# Altium PCB L_radar_some_PCBs.PcbDoc (part 1 of 3)
Units mm, origin at the board's own origin, x right, y up, seen from the top; angles counter-clockwise.
Board outline 152.4 x 101.6 mm, 8 copper layers (Top Layer, Layer 5, Layer 3, Layer 1, Layer 2, Layer 4, Layer 6, Bottom Layer), stack 1.028 mm thick; 12 components, 0 nets, 0 pads, 2735 vias.
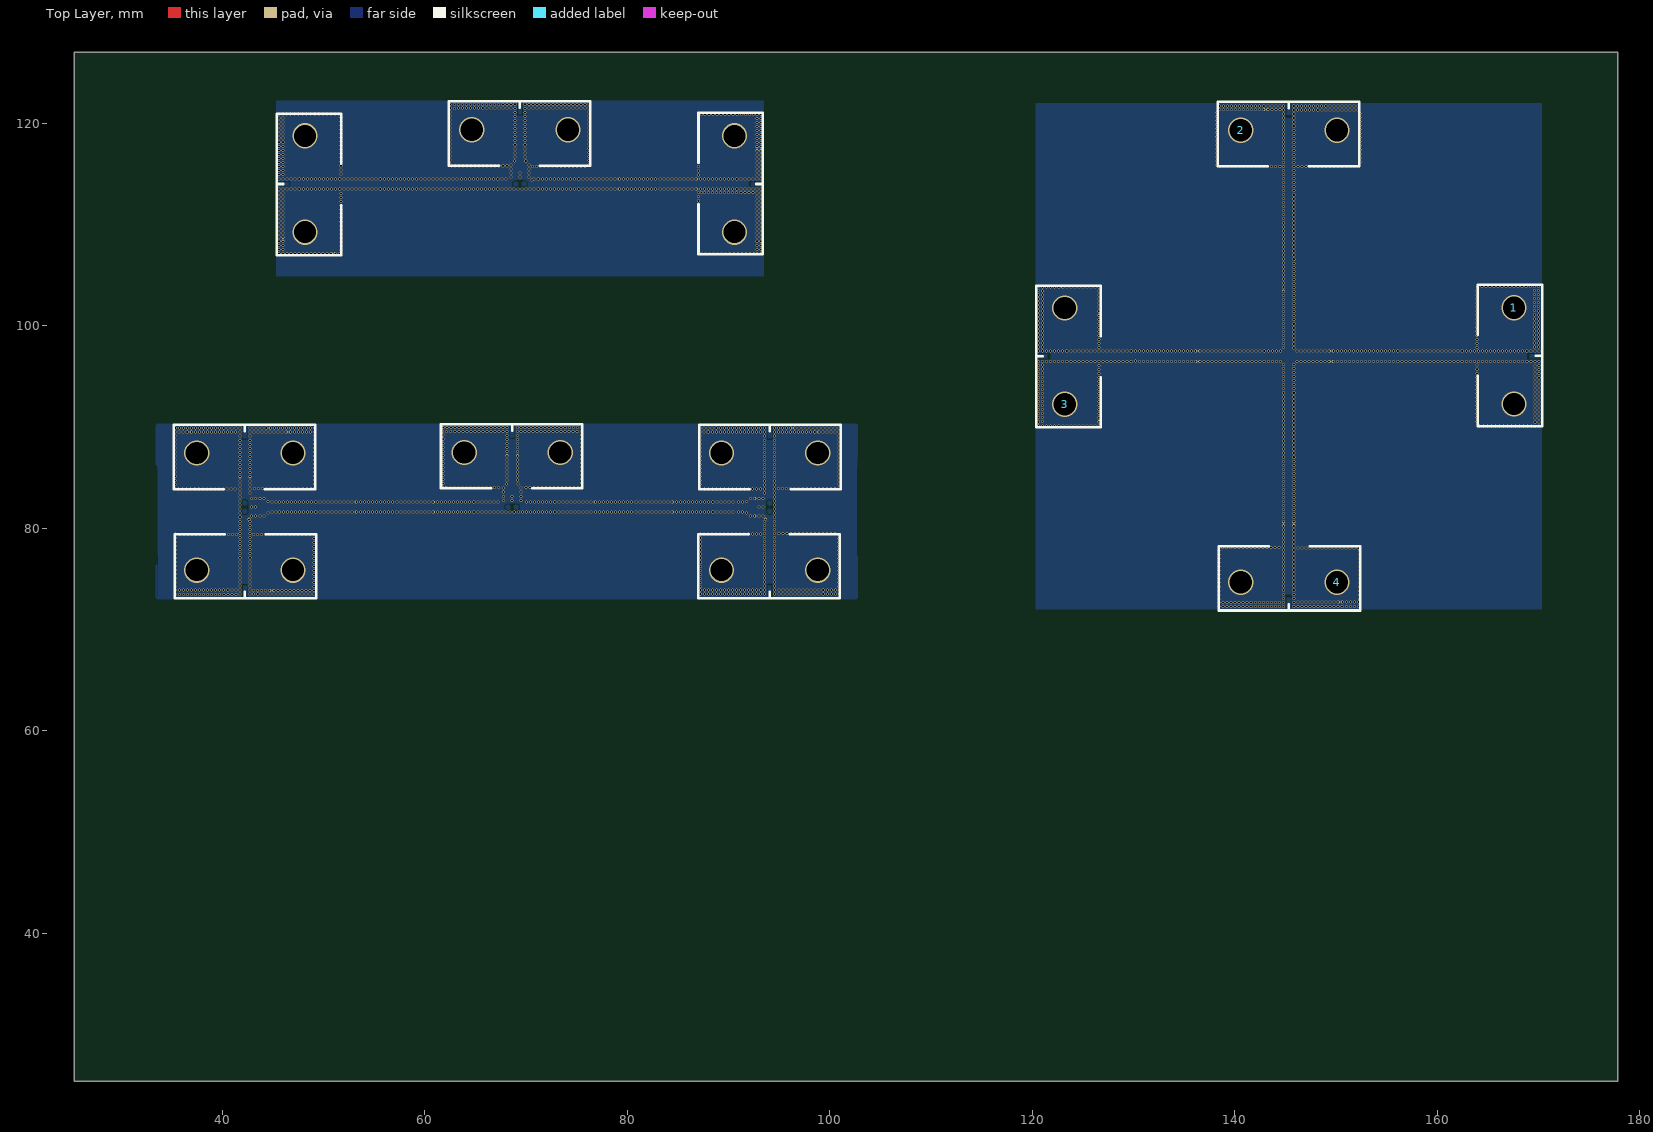
[diagram p0: Top Layer view]
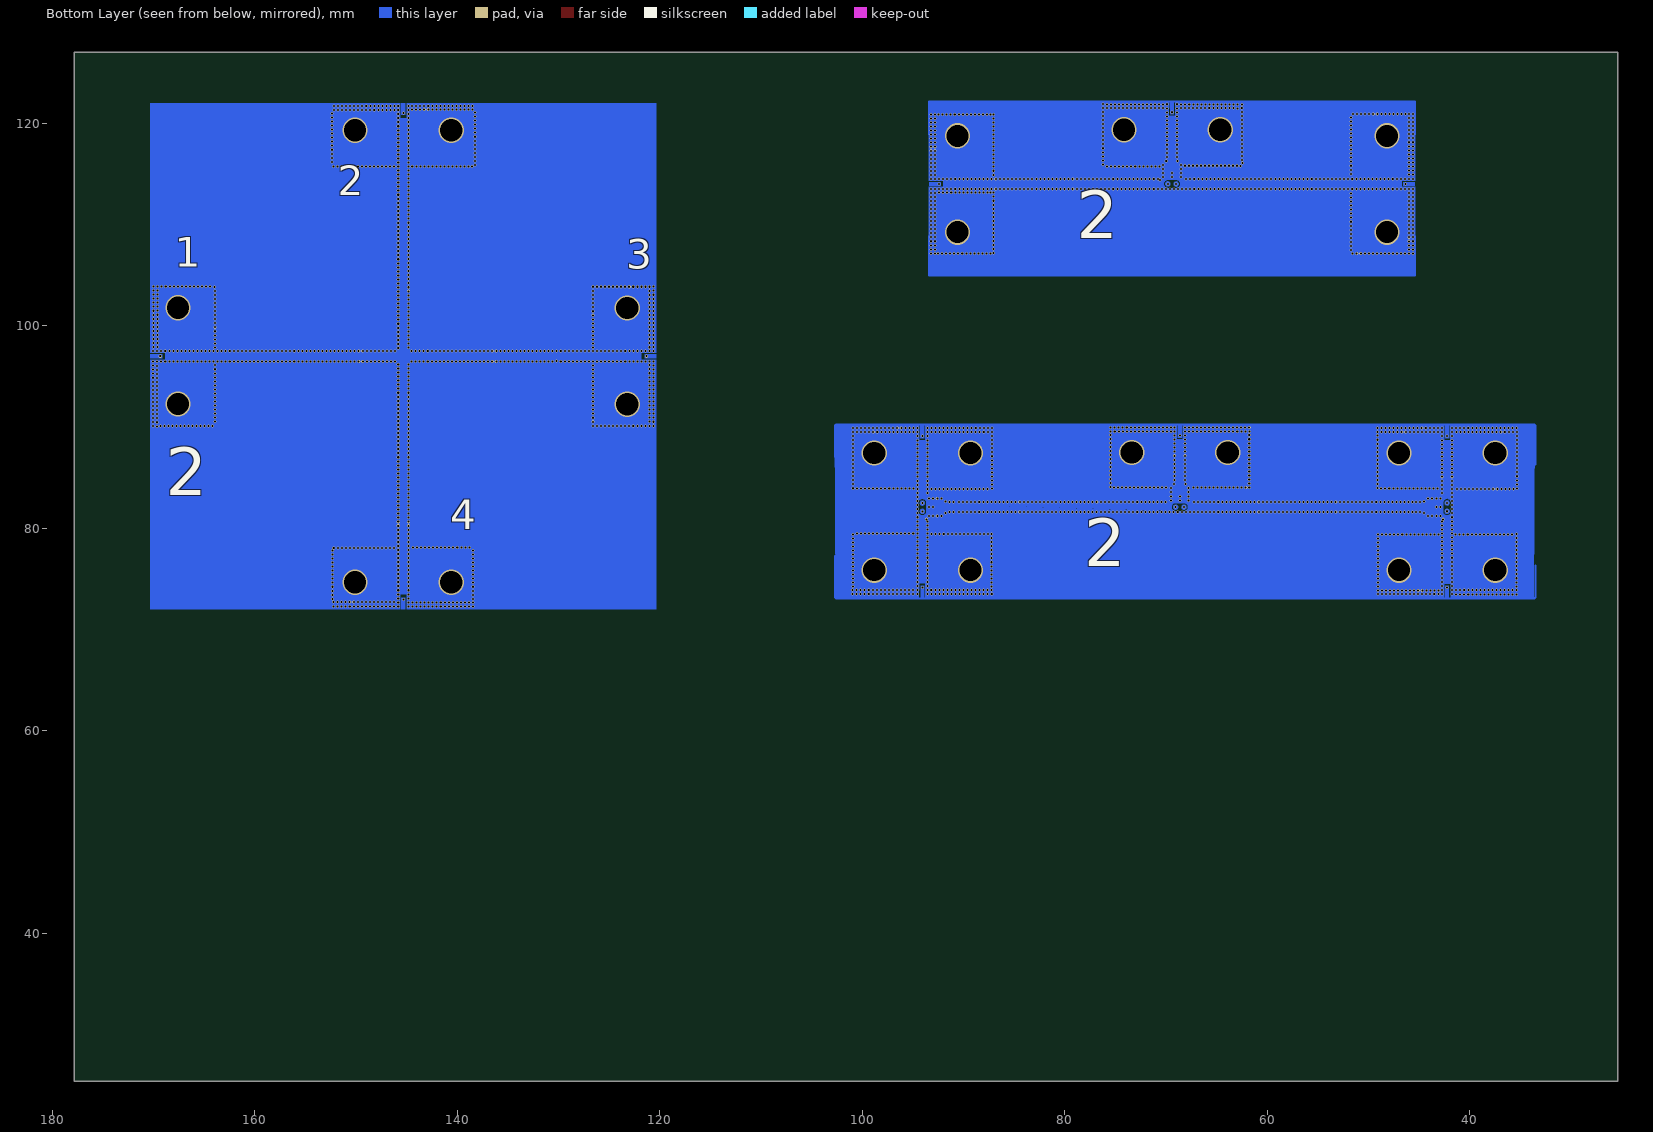
[diagram p1: Bottom Layer view, seen from below]
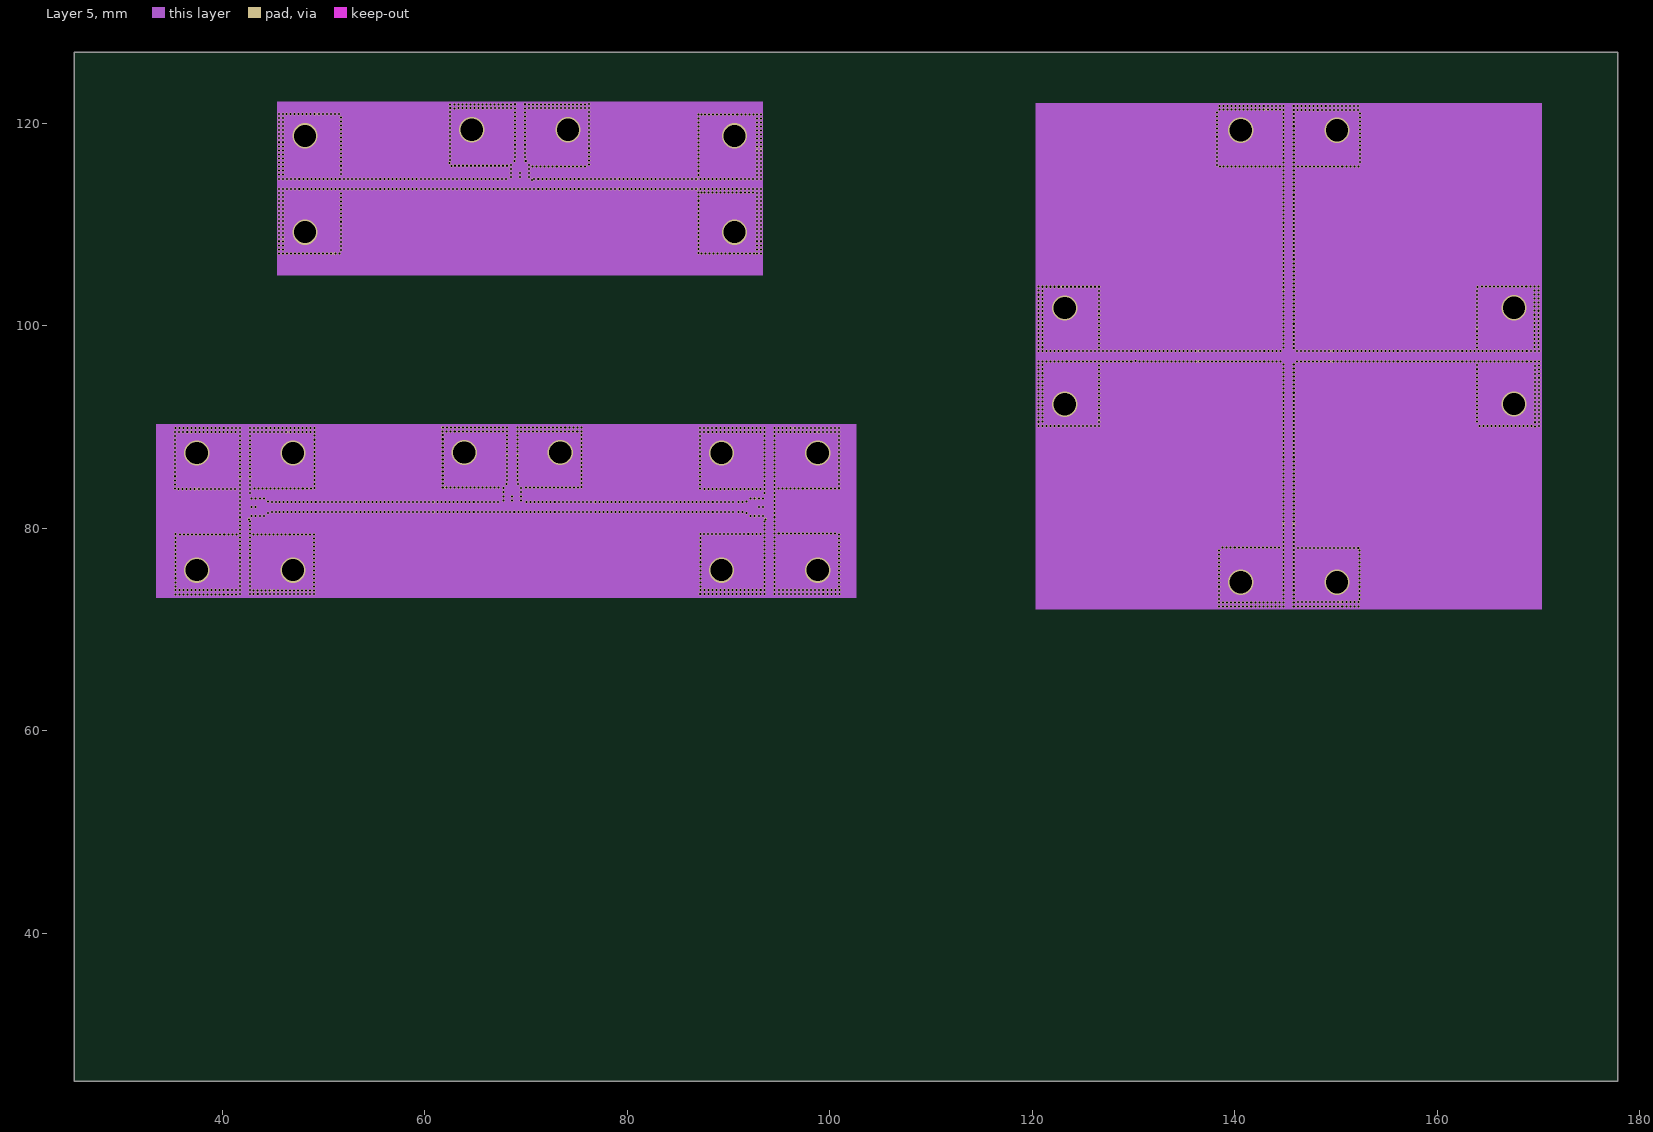
[diagram p2: Layer 5]
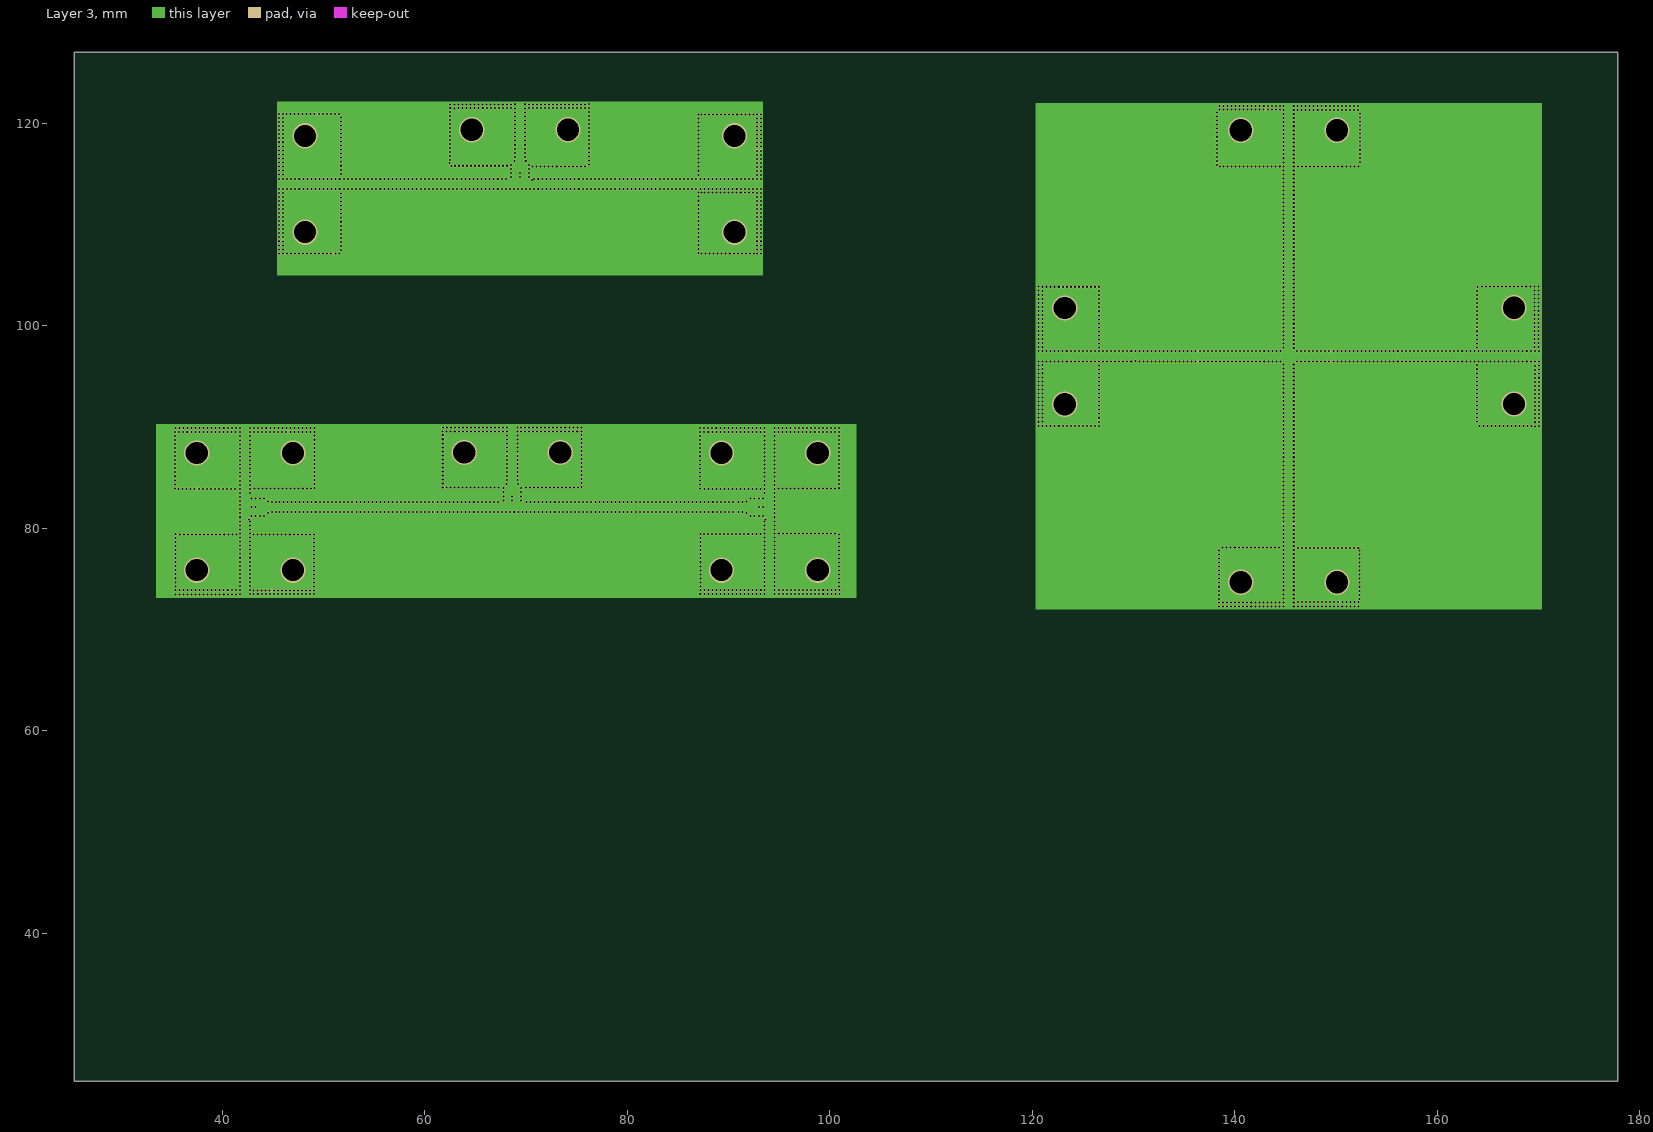
[diagram p3: Layer 3]
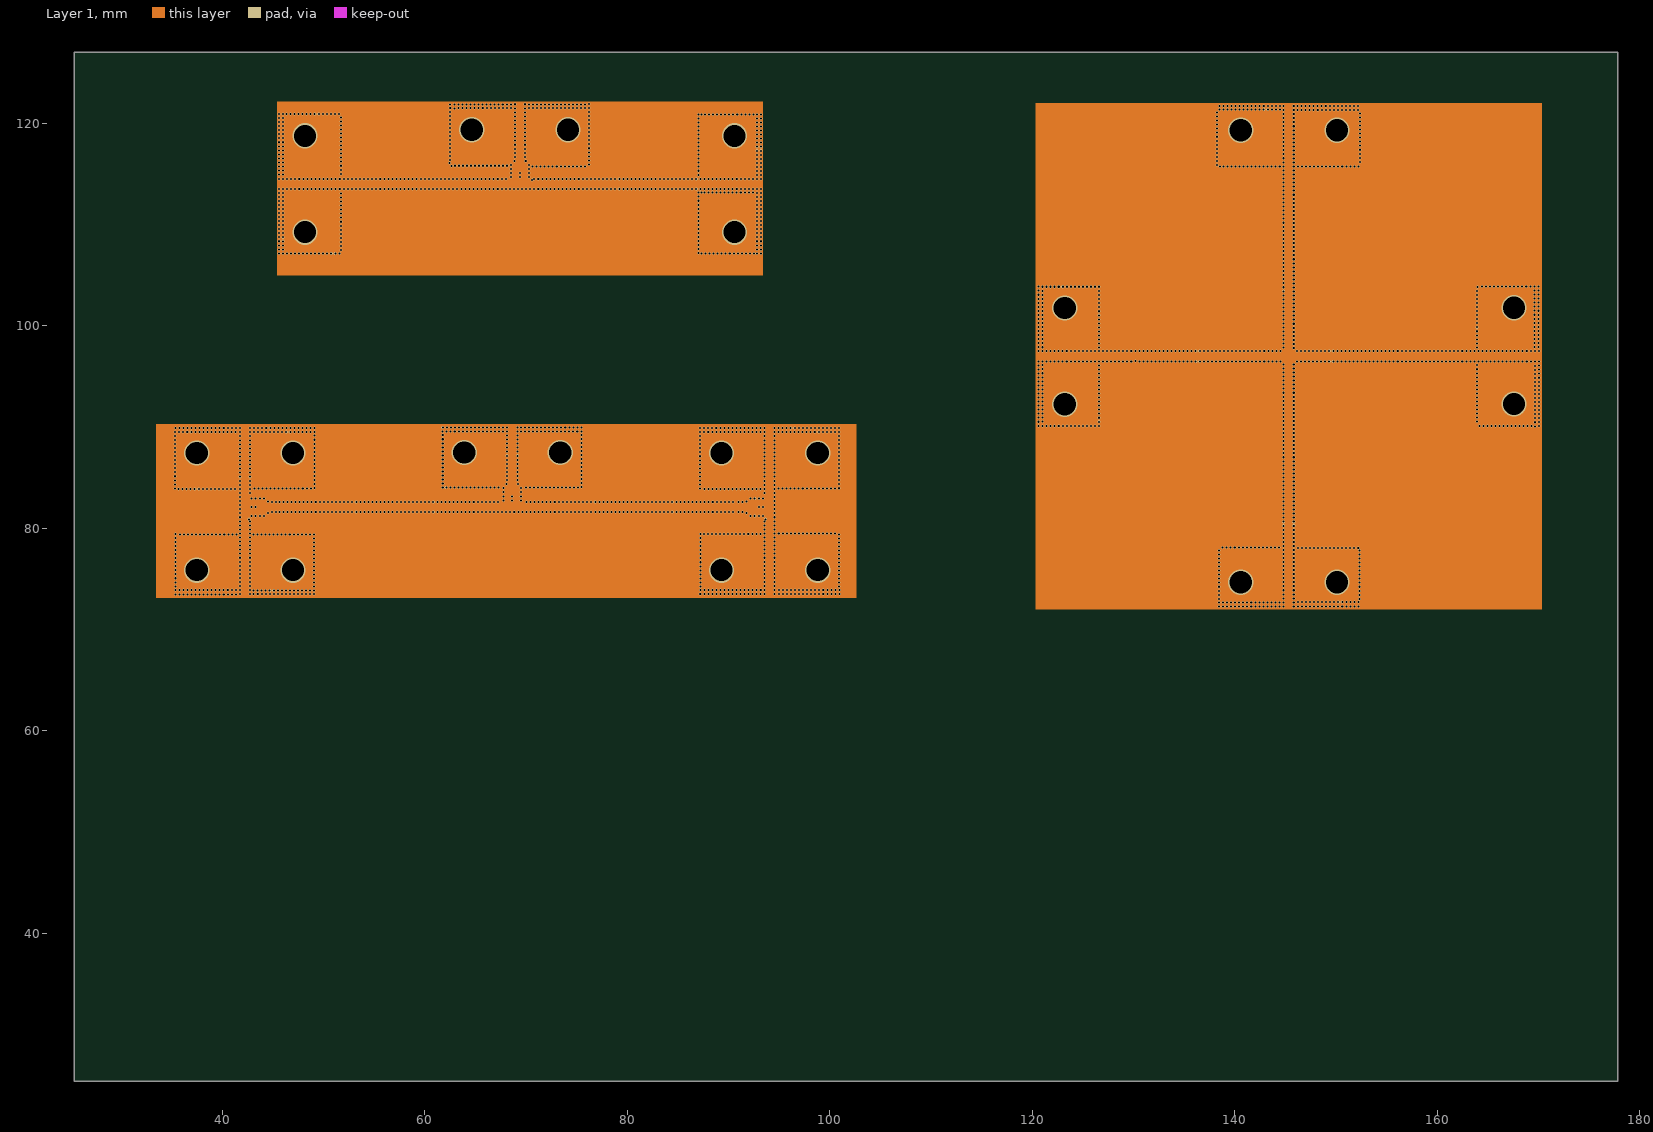
[diagram p4: Layer 1]
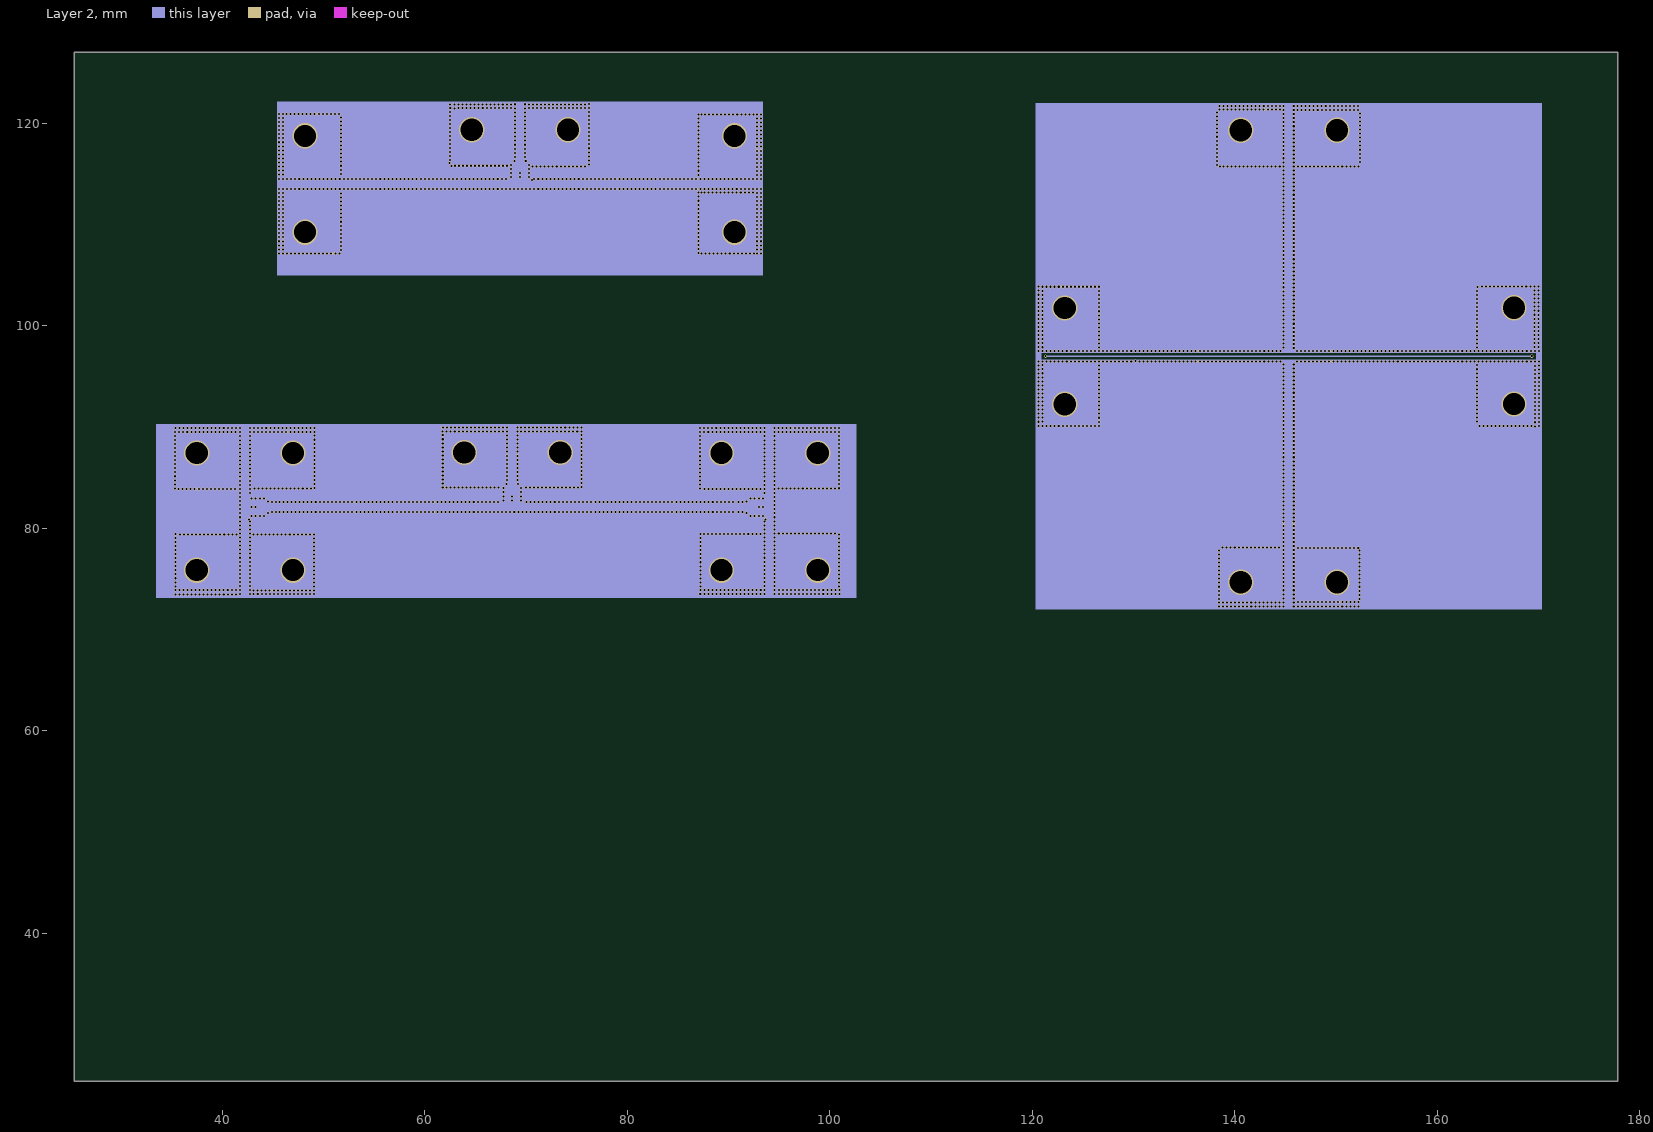
[diagram p5: Layer 2]
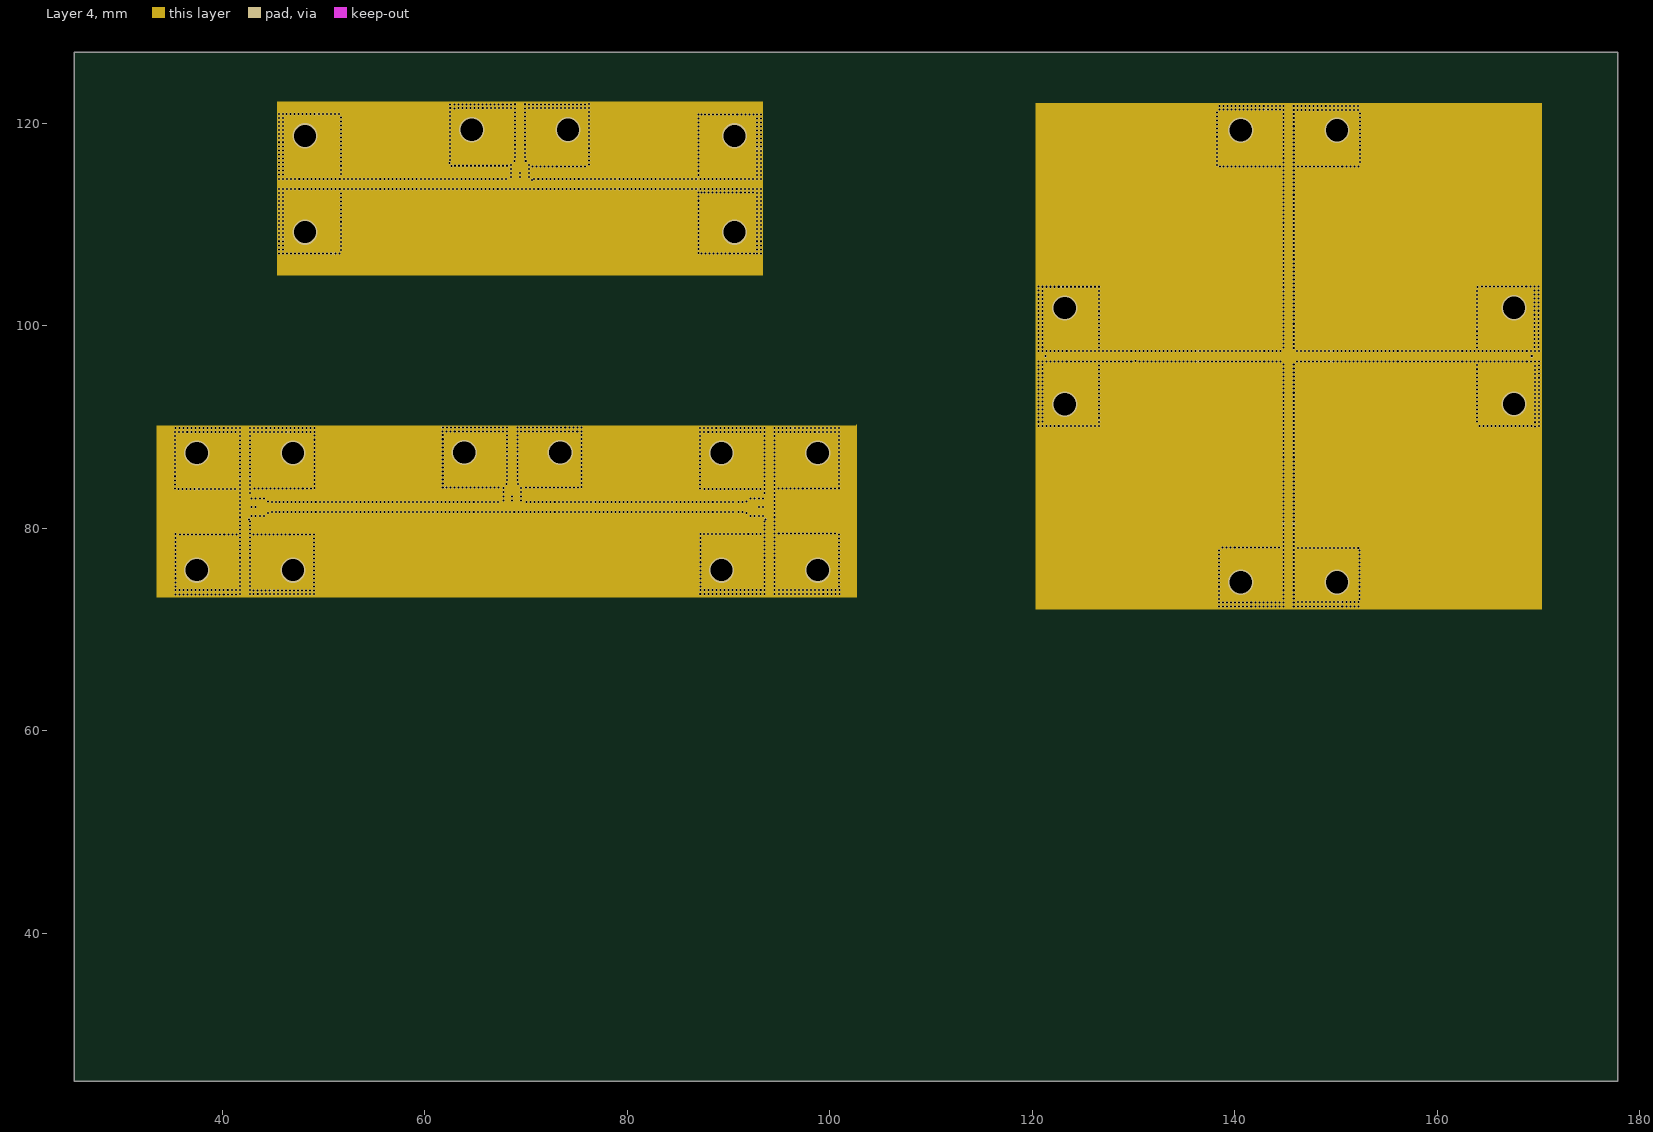
[diagram p6: Layer 4]
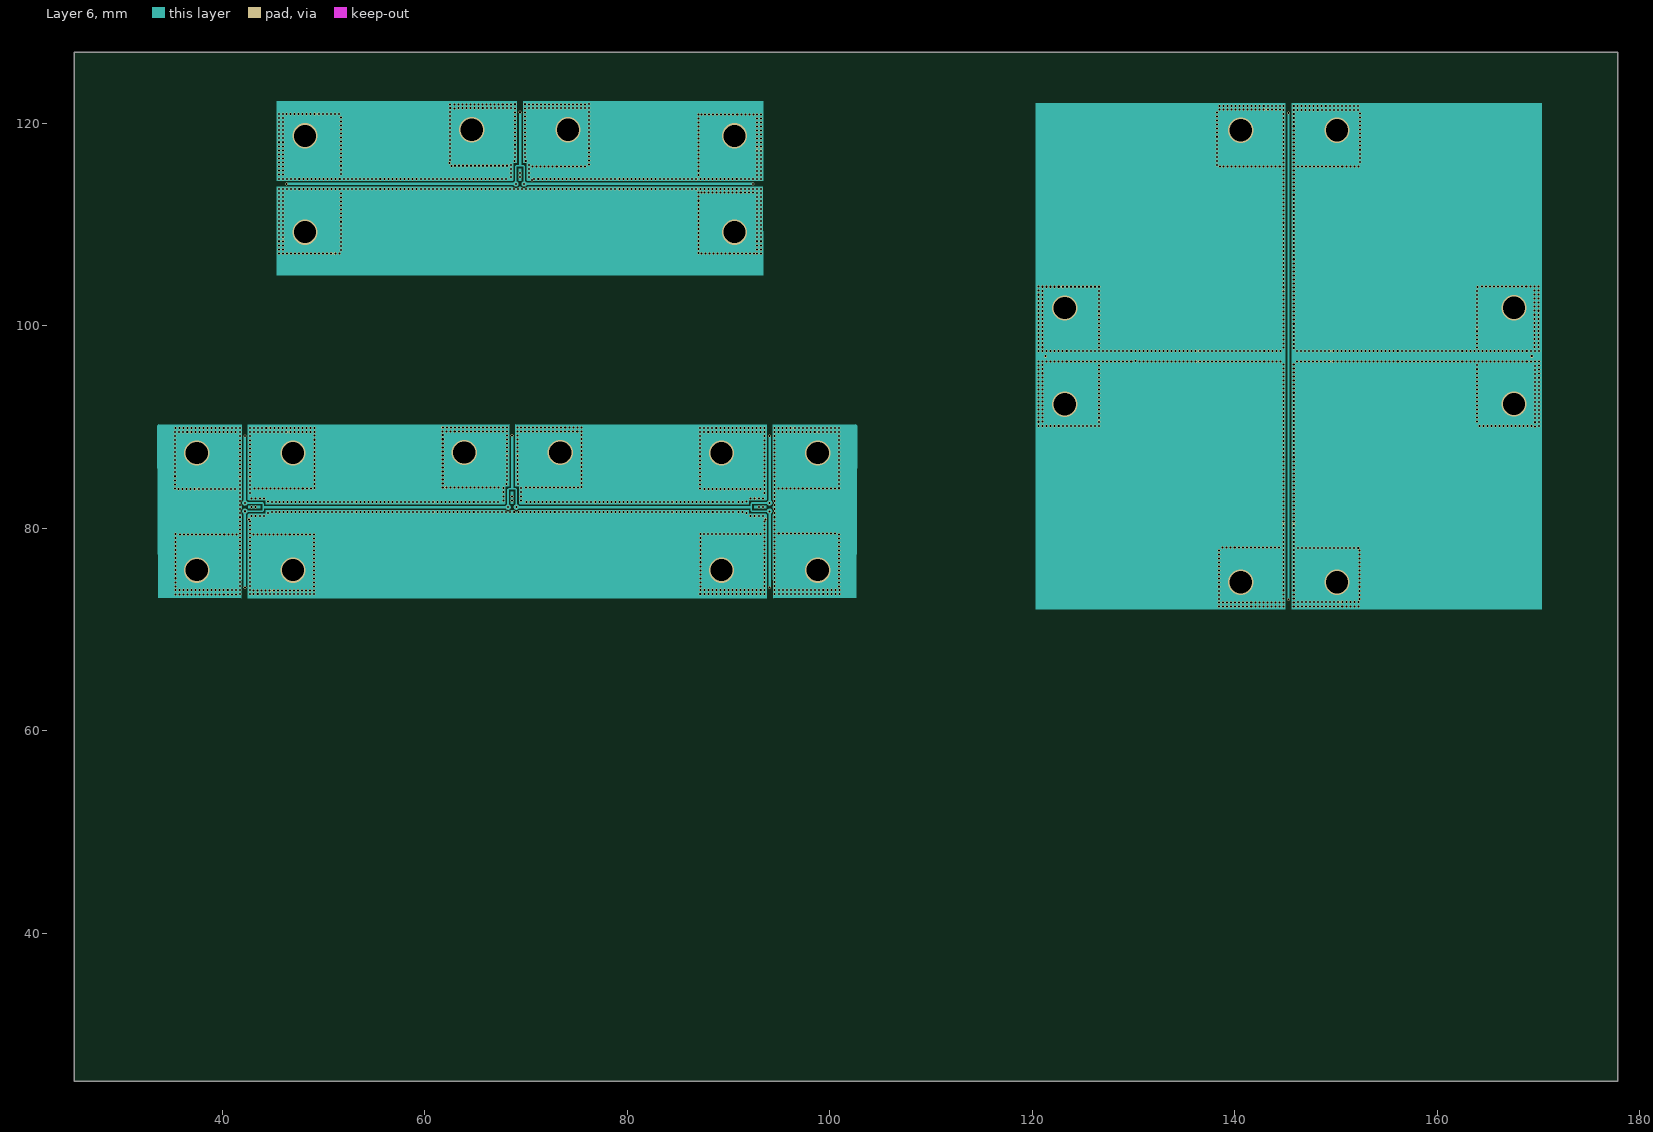
[diagram p7: Layer 6]

## Layer stack, top to bottom
Top Solder: solder mask 0.0102, Solder Resist, Dk 3.5
Top Layer: signal copper 0.0356
Dielectric 6: prepreg 0.0711, PP-006, Dk 4.1
Layer 5: signal copper 0.035
Dielectric 4: prepreg 0.0711, PP-006, Dk 4.1
Layer 3: signal copper 0.035
Dielectric 2: prepreg 0.0711, PP-006, Dk 4.1
Layer 1: signal copper 0.035
Dielectric 1: dielectric 0.32, FR-4, Dk 4.8
Layer 2: signal copper 0.035
Dielectric 3: prepreg 0.0711, PP-006, Dk 4.1
Layer 4: signal copper 0.035
Dielectric 5: prepreg 0.0711, PP-006, Dk 4.1
Layer 6: signal copper 0.035
Dielectric 7: prepreg 0.0711, PP-006, Dk 4.1
Bottom Layer: signal copper 0.0356
Bottom Solder: solder mask 0.0102, Solder Resist, Dk 3.5

## Board outline
25.4,25.4 177.8,25.4 177.8,127 25.4,127

## Design rules (kind name [scope] priority, off if disabled: settings)
Clearance [All] p1: gap=0.254 ignorepadtopadclearanceinfootprint=FALSE except(0: Arc-Hole Track-Hole SMDPad-Hole THPad-Hole Via-Hole Fill-Hole Poly-Hole Region-Hole Text-Hole)
PolygonConnect [All] p1: connectstyle=Relief reliefconductorwidth=0.254 reliefentries=4 polygonreliefangle="90 Angle" airgapwidth=0.254
RoutingVias [All] p1: holewidth=0.711 width=1.27 viastyle="Through Hole" minholewidth=0.711 minwidth=1.27 maxholewidth=0.711 maxwidth=1.27
SolderMaskExpansion [All] p1: expansion=0.102 istentingtop=FALSE
Width [All] p1: maxlimit=0.254 minlimit=0.254 preferedwidth=0.254
30 further rules are at their usual default settings.

## Components (designator, comment, footprint, x,y, rotation, side; value= is the part's Value field where it differs from the comment)
1 "Comment" PCBComponent_1 167.551,101.765 r270 top
2 "Comment" PCBComponent_1 140.576,119.304 r0 top
3 "Comment" PCBComponent_1 123.19,92.253 r90 top
4 "Comment" PCBComponent_1 150.076,74.676 r180 top
? "Comment" PCBComponent_1 98.813,87.427 r180 top
? "Comment" PCBComponent_1 89.313,75.87 r0 top
? "Comment" PCBComponent_1 46.99,75.87 r180 top
? "Comment" PCBComponent_1 37.49,87.427 r0 top
? "Comment" PCBComponent_1 63.894,87.49 r0 top
? "Comment" PCBComponent_1 90.589,118.745 r270 top
? "Comment" PCBComponent_1 48.184,109.245 r90 top
? "Comment" PCBComponent_1 64.656,119.355 r0 top

## Footprints (in the part's own frame and the unit in brackets; to place one, negate y for a bottom-side part, rotate by r counter-clockwise, add the part's x,y. Pads: shape width x height; smd on the part's side, far side on the other; paste and mask are expansions set on the pad)
PCBComponent_1 [mm]
  silkscreen extent -2.29,-3.56 11.68,2.79

## Via types
v1: diameter 0.3, hole 0.2, Top Layer to Bottom Layer, tented both sides, 2691 vias
v2: diameter 2.5, hole 2.2, Top Layer to Bottom Layer, tented both sides, 24 vias
v3: diameter 0.3, hole 0.2, Layer 6 to Bottom Layer, tented both sides, 18 vias
v4: diameter 0.3, hole 0.2, Layer 2 to Bottom Layer, tented both sides, 2 vias